# EAGLE board ifacegdcombo (EAGLE 7.2.0)
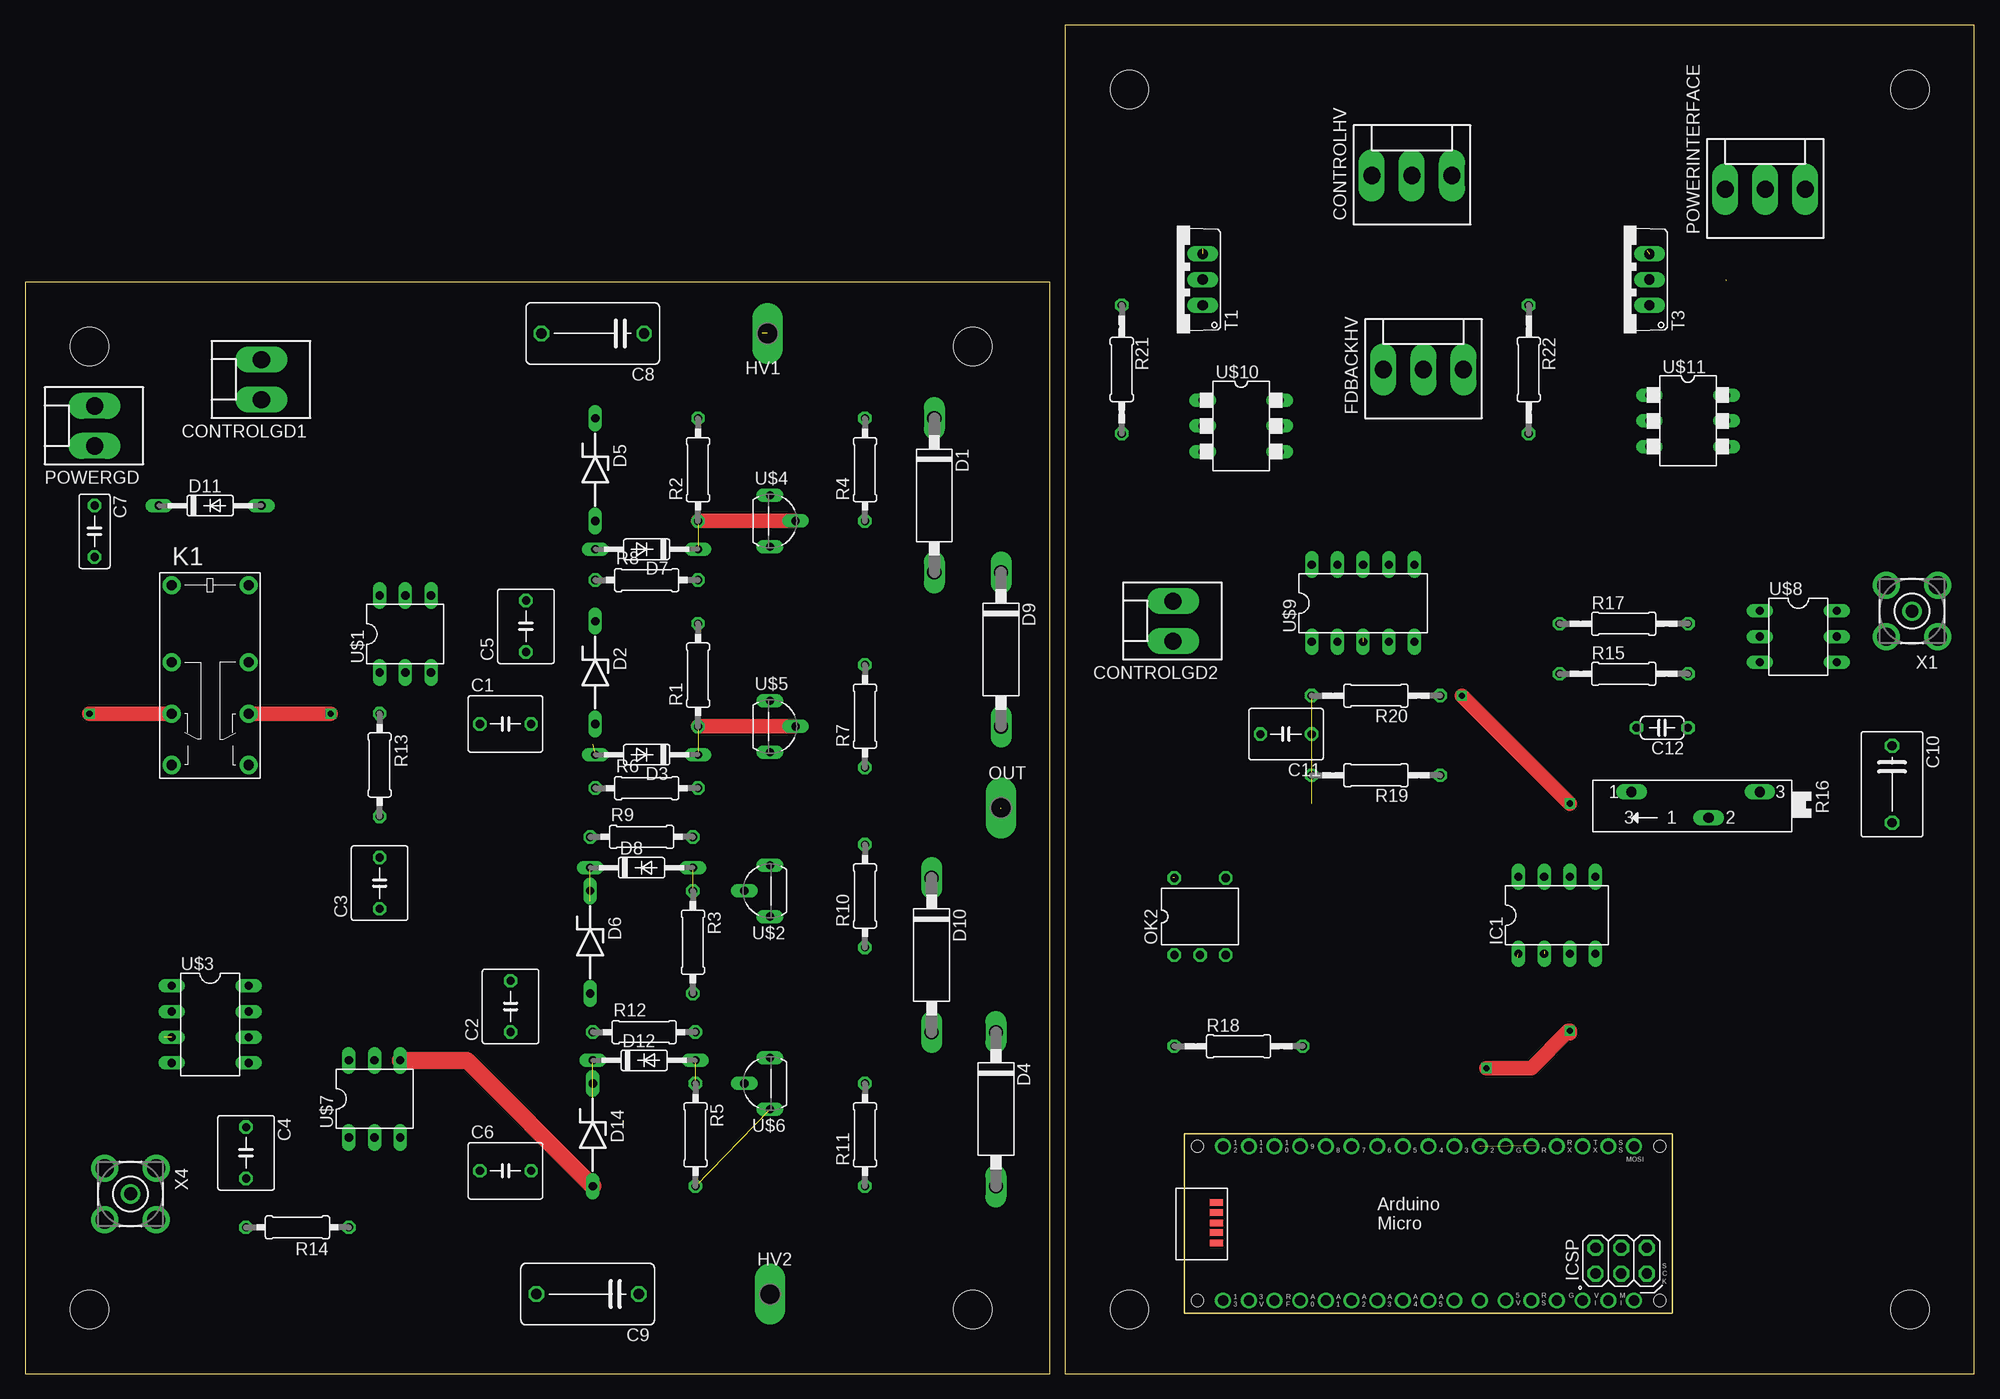
[diagram p0: board, top side]
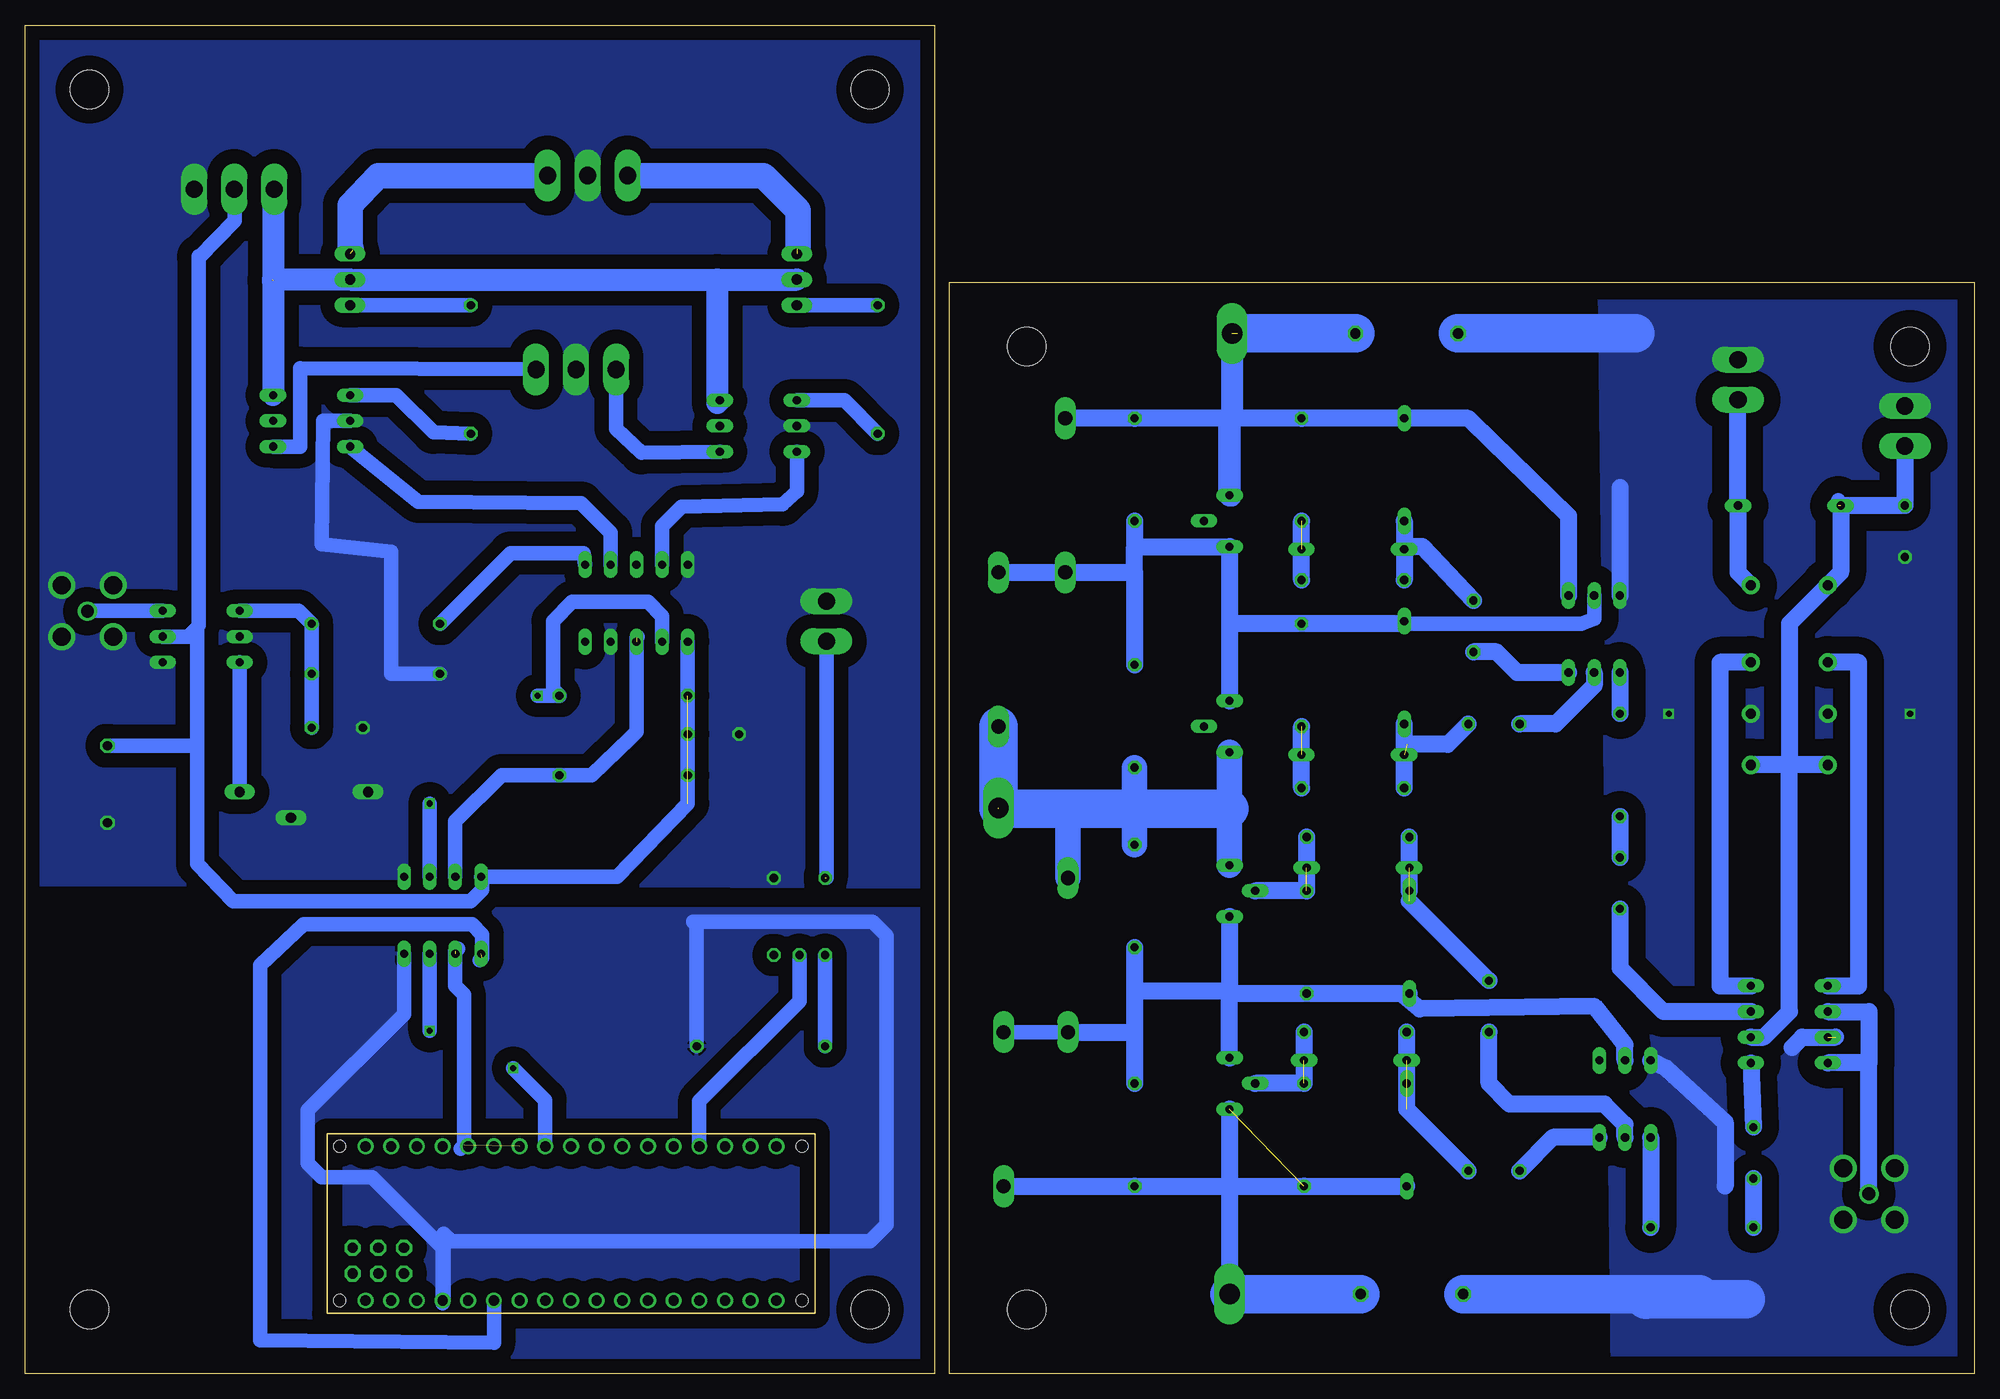
[diagram p1: board, bottom side, seen from below]

Size 192.79 x 133.35 mm. Coordinates in mm from the lower left corner, seen from the top.
Outline: 0,0 101.35,0 101.35,107.95 0,107.95 0,0
Outline: 102.87,0 192.79,0 192.79,133.35 102.87,133.35 102.87,0
Copper layers (1*16): Top 0.035mm / dielectric 1.5mm / Bottom 0.035mm
Design rules "default": minimum track width 10mil, minimum drill 24mil, track to track 8mil, track to pad 8mil, pad to pad 8mil, via to via 8mil, smd to smd 8mil, copper to edge 40mil, drill to drill 8mil, minimum pad ring 10mil, minimum via ring 8mil, stop-mask expansion 4mil, vias tented up to drill 0mil, thermal gap 10mil
Holes 3.8 mm at 93.73,101.6 93.73,6.35 6.35,6.35 6.35,101.6 186.44,6.35 186.44,127 109.22,127 109.22,6.35

## Footprints (pad centres in the part's own frame; a part is rotated, then mirrored left to right if it is on the bottom)
C050-055X075 = drill 0.813 octagon: 1 -2.54,0; 2 2.54,0
C050-030X075 = drill 0.813 octagon: 1 -2.54,0; 2 2.54,0
C102-064X133 = drill 1.016 octagon: 1 -5.08,0; 2 5.08,0
C075-063X106 = drill 0.914 octagon: 1 -3.81,0; 2 3.81,0
C050-050X075 = drill 0.813 octagon: 1 -2.54,0; 2 2.54,0
C050-024X044 = drill 0.813 octagon: 1 -2.54,0; 2 2.54,0
KK-156-2 = drill 1.7 pad 2.184 long: 1 -1.98,0; 2 1.98,0
KK-156-3 = drill 1.7 pad 2.184 long: 1 -3.96,0; 2 0,0; 3 3.96,0
C1702-15 = drill 1.397 long: A 7.62,0; C -7.62,0
ZDIO-10 = drill 0.813 long: A 5.08,0; C -5.08,0
DO35-10 = drill 0.813 long: A 5.08,0; C -5.08,0
P1-20Y = drill 2.007 pad 2.54 long: TP 0,0
DIL08 = drill 0.813 long: 1 -3.81,-3.81; 2 -1.27,-3.81; 3 1.27,-3.81; 4 3.81,-3.81; 5 3.81,3.81; 6 1.27,3.81; 7 -1.27,3.81; 8 -3.81,3.81
G5V-2 = drill 1 pad 1.8: 1 -8.89,-3.81; 4 -1.27,-3.81; 6 3.81,-3.81; 8 8.89,-3.81; 9 8.89,3.81; 11 3.81,3.81; 13 -1.27,3.81; 16 -8.89,3.81
DIL05 = drill 0.813 octagon: 1 -2.54,-3.81; 2 0,-3.81; 3 2.54,-3.81; 4 2.54,3.81; 6 -2.54,3.81
ARDUINO_MICRO = drill 1.016 pad 1.575: 3V3 6.35,1.27; +5V 31.75,1.27; A0 11.43,1.27; A1 13.97,1.27; A2 16.51,1.27; A3 19.05,1.27; A4 21.59,1.27; A5 24.13,1.27; D2 29.21,16.51; D3 26.67,16.51; D4 24.13,16.51; D5 21.59,16.51; D6 19.05,16.51; D7 16.51,16.51; D8 13.97,16.51; D9 11.43,16.51; D10 8.89,16.51; D11 6.35,16.51; D12 3.81,16.51; D13 3.81,1.27; GND 31.75,16.51; GND. 36.83,1.27; MISO] 41.91,1.27; MOSI 44.45,16.51; NC 26.67,1.27; NC. 29.21,1.27; REF 8.89,1.27; RST 34.29,16.51; RST. 34.29,1.27; RX1 36.83,16.51; SCK 44.45,1.27; SS 41.91,16.51; TX1 39.37,16.51; VIN 39.37,1.27 | drill 1.016 pad 1.575 octagon: 5V 40.64,6.477; GND_ 45.72,6.477; MISO. 40.64,3.937; MOSI. 43.18,6.477; RESET.. 45.72,3.937; SCK. 43.18,3.937 | smd 1.27 x 0.635: <USB>+V 3.15,10.947; <USB>D+ 3.15,9.957; <USB>D- 3.15,8.941; <USB>GND 3.15,6.96; <USB>ID 3.15,7.976 | hole 1.2: 1.27,1.27; 1.27,16.51; 46.99,16.51; 46.99,1.27
0207/10 = drill 0.813 octagon: 1 -5.08,0; 2 5.08,0
0207/12 = drill 0.813 octagon: 1 -6.35,0; 2 6.35,0
SP19L = drill 1.016 long: A 5.715,-1.27; E -6.985,-1.27; S -1.905,1.27
TO220V = drill 1.016 long: 1 -2.54,-2.54; 2 0,-2.54; 3 2.54,-2.54
DIL06 = drill 0.813 long: 1 -2.54,-3.81; 2 0,-3.81; 3 2.54,-3.81; 4 2.54,3.81; 5 0,3.81; 6 -2.54,3.81
TO92L = drill 0.813 long: 1 0,-2.54; 2 2.54,0; 3 0,2.54
DIL06' = drill 0.813 long: DIV 2.54,3.81; GND 0,-3.81; MOD -2.54,-3.81; OUT -2.54,3.81; SET 2.54,-3.81; VCC 0,3.81
DIL10 = drill 0.813 long: 1 -5.08,-3.81; 2 -2.54,-3.81; 3 0,-3.81; 4 2.54,-3.81; 5 5.08,-3.81; 6 5.08,3.81; 7 2.54,3.81; 8 0,3.81; 9 -2.54,3.81; 10 -5.08,3.81
DIL06-4 = drill 0.813 long: 1 -2.54,-3.81; 2 0,-3.81; 3 2.54,-3.81; 4 2.54,3.81; 5 0,3.81; 6 -2.54,3.81
BU-SMA-V = drill 1.27: 1 0,0 | drill 1.778: 2 -2.55,2.55; 3 2.55,2.55; 4 2.55,-2.55; 5 -2.55,-2.55

## Placement (x,y rotation side)
C1  .22u  [C050-055X075]  47.5,64.26 0 top
C2  .22u  [C050-055X075]  48.01,36.32 90 top
C3  .22u  [C050-055X075]  35.05,48.51 90 top
C4  .22u  [C050-055X075]  21.84,21.84 270 top
C5  .22u  [C050-055X075]  49.53,73.91 90 top
C6  .22u  [C050-055X075]  47.5,20.07 0 top
C7  [C050-030X075]  6.86,83.31 270 top
C8  10p  [C102-064X133]  56.13,102.87 180 top
C9  10p  [C102-064X133]  55.63,7.87 180 top
C10  [C075-063X106]  184.66,58.29 270 top
C11  [C050-050X075]  124.71,63.25 180 top
C12  10n  [C050-024X044]  161.93,63.88 180 top
CONTROLGD1  [KK-156-2]  23.37,98.3 90 top
CONTROLGD2  [KK-156-2]  113.54,74.42 90 top
CONTROLHV  [KK-156-3]  137.16,118.49 0 top
D1  P6KEXXA  [C1702-15]  89.92,86.87 270 top
D2  4742  [ZDIO-10]  56.39,69.34 270 top
D3  1N4148DO35-10  [DO35-10]  61.47,61.21 180 top
D4  P6KEXXA  [C1702-15]  96.01,26.16 270 top
D5  4742  [ZDIO-10]  56.39,89.41 270 top
D6  4742  [ZDIO-10]  55.88,42.67 270 top
D7  1N4148DO35-10  [DO35-10]  61.47,81.53 180 top
D8  1N4148DO35-10  [DO35-10]  60.96,50.04 0 top
D9  P6KEXXA  [C1702-15]  96.52,71.63 270 top
D10  P6KEXXA  [C1702-15]  89.66,41.4 270 top
D11  1N4148DO35-10  [DO35-10]  18.29,85.85 0 top
D12  1N4148DO35-10  [DO35-10]  61.21,30.99 0 top
D14  4742  [ZDIO-10]  56.13,23.62 270 top
FDBACKHV  [KK-156-3]  138.3,99.31 0 top
HV1  TPPAD1-20Y  [P1-20Y]  73.41,102.87 180 top
HV2  TPPAD1-20Y  [P1-20Y]  73.66,7.87 0 top
IC1  ISO1540  [DIL08]  151.51,45.34 0 top
K1  G5V-2  [G5V-2]  18.29,69.09 270 top
OK2  H11F1  [DIL05]  116.2,45.21 0 top
OUT  TPPAD1-20Y  [P1-20Y]  96.52,55.96 0 top
PCB1  ARDUINO_MICRO  [ARDUINO_MICRO]  114.68,5.97 0 top
POWERGD  [KK-156-2]  6.86,93.73 90 top
POWERINTERFACE  [KK-156-3]  172.11,117.14 0 top
R1  50k  [0207/10]  66.55,69.09 90 top
R2  50k  [0207/10]  66.55,89.41 90 top
R3  50k  [0207/10]  66.04,42.67 270 top
R4  1M  [0207/10]  83.06,89.41 90 top
R5  50k  [0207/10]  66.29,23.62 270 top
R6  70  [0207/10]  61.47,57.91 0 top
R7  1M  [0207/10]  83.06,65.02 90 top
R8  70  [0207/10]  61.47,78.49 0 top
R9  70  [0207/10]  60.96,53.09 0 top
R10  1M  [0207/10]  83.06,47.24 90 top
R11  1M  [0207/10]  83.06,23.62 90 top
R12  70  [0207/10]  61.21,33.78 0 top
R13  70  [0207/10]  35.05,60.2 270 top
R14  1M  [0207/10]  26.92,14.48 180 top
R15  10k  [0207/12]  158.12,69.22 0 top
R16  [SP19L]  164.59,56.26 180 top
R17  40k  [0207/12]  158.12,74.17 0 top
R18  100  [0207/12]  120.02,32.38 0 top
R19  1.5k  [0207/12]  133.6,59.18 180 top
R20  1.5k  [0207/12]  133.6,67.06 180 top
R21  1k  [0207/12]  108.46,99.31 270 top
R22  1k  [0207/12]  148.72,99.31 270 top
T1  TIP122V  [TO220V]  113.92,108.2 90 top
T3  TIP122V  [TO220V]  158.12,108.2 90 top
U$1  DA-2320  [DIL06]  37.59,73.15 0 top
U$2  VN0550L  [TO92L]  73.66,47.75 180 top
U$3  UCC27425  [DIL08]  18.29,34.54 270 top
U$4  VP0550L  [TO92L]  73.66,84.33 0 top
U$5  VP0550L  [TO92L]  73.66,64.01 0 top
U$6  VN0550L  [TO92L]  73.66,28.7 180 top
U$7  DA-2320  [DIL06]  34.54,27.18 0 top
U$8  LTC6992  [DIL06']  175.39,72.9 270 top
U$9  MCP4728DIL  [DIL10]  132.33,76.2 0 top
U$10  MAX9650DIL  [DIL06-4]  120.27,93.73 270 top
U$11  MAX9650DIL  [DIL06-4]  164.47,94.23 270 top
X1  BU-SMA-V  [BU-SMA-V]  186.64,75.41 180 top
X4  BU-SMA-V  [BU-SMA-V]  10.41,17.78 270 top

## Library data of the parts
C1-C6 C8-C10 C12 R15 R17 R19-R22 = resistor
C7 C11 R1-R14 R18 = rcl
CONTROLGD1 CONTROLGD2 CONTROLHV FDBACKHV POWERGD POWERINTERFACE = con-molex; OC_FARNELL: unknown; OC_NEWARK: unknown
D1-D12 D14 = diode
HV1 HV2 OUT = testpad
IC1 U$3 = texas
K1 = relay; MPN: G5V-2 5DC; OC_FARNELL: 9949488; OC_NEWARK: 78K5703
OK2 = optocoupler; OC_FARNELL: unknown; OC_NEWARK: unknown
PCB1 = E14_Arduino_published
R16 = pot
T1 T3 = transistor-npn
U$1 U$7 = trafo
U$2 U$4-U$6 = transistor-fet
U$8 = linear-technology
U$9 = microchip
U$10 U$11 = maxim
X1 X4 = con-coax; OC_FARNELL: unknown; OC_NEWARK: unknown

## Nets
+12V: POWERINTERFACE.1 T1.2 T3.2 U$10.6 U$11.6
+15V: C7.1 D11.C K1.1 K1.8 K1.9 POWERGD.1 U$3.6
A+5: IC1.1 PCB1.+5V
AGND: IC1.4 PCB1.GND. R18.2
D4: PCB1.D4
D7: PCB1.D7
D8: PCB1.D8
D10: PCB1.D10
D11: PCB1.D11
ENSW: CONTROLGD1.1 D11.A K1.16
ENSW2: CONTROLGD2.1 OK2.6
GND: C7.2 C8.2 C9.2 CONTROLGD1.2 K1.6 K1.11 POWERGD.2 U$1.6 U$3.3 U$7.6 X4.2 X4.3 X4.4 X4.5
GND1: C10.2 C11.2 C12.2 CONTROLGD2.2 CONTROLHV.2 FDBACKHV.2 IC1.5 OK2.4 POWERINTERFACE.3 R15.1 R16.A R16.S U$8.DIV U$8.GND U$9.4 U$9.10 U$10.2 U$11.2 X1.2 X1.3 X1.4 X1.5
N$1: U$3.2 U$3.4 X4.1
N$2: C3.1 U$3.7
N$3: R13.1 U$1.1
N$4: C4.1 U$3.5
N$5: C1.1 U$1.2
N$6: R14.1 U$7.1
N$7: C5.1 U$1.3
N$8: D3.C R1.1 R6.2 U$5.2
N$9: U$7.5
N$10: C1.2 D2.A D3.A R6.1
N$11: D12.A R5.1 R12.2 U$6.2
N$12: D7.C R2.1 R8.2 U$4.2
N$13: D4.C D6.A D10.A R3.2 R10.1 R11.2 U$2.3 U$6.1
N$14: K1.4 U$3.1
N$15: K1.13 U$3.8
N$16: C5.2 D5.A D7.A R8.1
N$17: C8.1 D1.C D5.C HV1.TP R2.2 R4.2 U$1.4 U$4.3
N$18: D1.A D2.C D9.C R1.2 R4.1 R7.2 U$1.5 U$4.1 U$5.3
N$19: C3.2 R13.2
N$20: C4.2 R14.2
N$21: D9.A D10.C OUT.TP R7.1 R10.2 U$2.1 U$5.1
N$22: C2.1 U$7.2
N$23: C6.1 U$7.3
N$24: C9.1 D4.A D14.A HV2.TP R5.2 R11.1 U$6.3 U$7.4
N$25: C2.2 D6.C D8.C R9.1
N$26: R16.E U$8.SET
N$27: C6.2 D12.C D14.C R12.1
N$28: U$8.OUT X1.1
N$29: OK2.1 R18.1
N$30: C12.1 R15.2 R17.2 U$8.MOD
N$31: FDBACKHV.1 U$10.4
N$32: FDBACKHV.3 U$11.4
N$33: U$9.9 U$10.3
N$34: U$9.8
N$35: U$9.7 U$11.3
N$36: R17.1 U$9.6
N$37: R22.1 T3.1
N$38: R21.2 U$10.1
N$39: R22.2 U$11.1
N$41: CONTROLHV.1 T1.3
N$42: CONTROLHV.3 T3.3
N$43: R21.1 T1.1
N$251: D8.A R3.1 R9.2 U$2.2
PWM5: PCB1.D5
PWM6: PCB1.D6
PWM9: OK2.2 PCB1.D9
SCL: IC1.3 PCB1.D3
SCL_OUT: IC1.6 R20.1 U$9.2
SDA: IC1.2 PCB1.D2
SDA_OUT: IC1.7 R19.1 U$9.3
VCC: C10.1 C11.1 IC1.8 POWERINTERFACE.2 R19.2 R20.2 U$8.VCC U$9.1

## Tracks (layer width: path | path; a pad name or v marks a point on that pad's centre or on a via)
+12V  (1 unrouted)
  Bottom 2.184: U$10.6 124.33,96.01 124.33,108.2 | 124.33,108.2 T3.2 168.28,108.2 | 124.33,108.2 T1.2 | POWERINTERFACE.1 168.28,117.02 168.28,108.08 U$11.6
+15V  (1 unrouted)
  Bottom 1.422: 13.46,85.85 13.46,86.36
  Bottom 1.676: D11.C 13.21,79.25 K1.1 18.29,74.17 18.29,60.2 | 18.29,60.2 18.29,35.81 20.83,33.27 U$3.6 | 18.29,60.2 K1.9 | K1.8 18.29,60.2 | POWERGD.1 C7.1 13.46,85.85
A+5  (1 unrouted)
  Bottom 1.422: PCB1.+5V 146.43,3.05 169.54,3.3 169.54,40.39 165.23,44.45 148.59,44.45 147.57,43.43 147.57,41.15 147.83,40.89
AGND
  Bottom 1.422: IC1.4 155.32,35.56 164.85,26.04 164.85,20.83 163.45,19.43 158.5,19.43 151.51,12.45 PCB1.GND. | PCB1.GND. 151.51,6.99 | R18.2 126.36,44.32 126.75,44.7 108.97,44.7 107.57,43.31 107.57,14.73 109.22,13.08 150.62,13.08 151.38,13.84 151.38,7.37 PCB1.GND.
  pour Bottom (isolate 1.422): 102.74,0.13 192.02,0.13 192.15,46.1 103,45.97
ENSW
  Bottom 1.676: CONTROLGD1.1 D11.A 23.37,79.25 K1.16
ENSW2  (1 unrouted)
  Bottom 1.422: CONTROLGD2.1 113.54,49.02
GND  (via drill 0.6)  (1 unrouted)
  Top 1.422: K1.11 v30.23,65.28 | K1.6 v6.35,65.28
  Bottom 1.676: 35.05,87.63 U$1.6 | U$7.6 30.48,30.23 24.64,24.89 24.64,18.54 | 18.03,32.26 17.02,33.27 13.72,33.27
  Bottom 3.81: 32.46,7.32 27.18,7.34 | 27.18,7.34 22.61,7.37 | C8.2 33.53,102.87 | C9.2 27.18,7.87 27.18,7.34
  pour Bottom (isolate 1.676, no thermals): 0.25,107.7 37.08,107.7 35.81,0 0.25,0
GND1
  Bottom 1.422: U$11.2 163.32,94.23 163.45,82.04 156.59,81.28 156.59,69.22 R15.1
  pour Bottom (isolate 1.422, no thermals): 103,133.22 192.91,133.22 192.79,48.39 172.21,48.39 172.47,48.51 103.25,48.13
N$1
  Bottom 1.676: X4.1 10.41,30.73 | U$3.2 10.41,35.81 10.41,30.73 | 10.41,30.73 U$3.4
N$2
  Bottom 1.676: U$3.7 30.73,35.81 35.05,40.13 C3.1
N$3
  Bottom 1.676: U$1.1 R13.1
N$4
  Bottom 1.676: U$3.5 C4.1
N$5
  Bottom 1.676: U$1.2 37.59,68.07 41.4,64.26 C1.1
N$6
  Bottom 1.676: U$7.1 R14.1
N$7
  Bottom 1.676: U$1.3 45.21,69.34 47.24,71.37 C5.1
N$8  (1 unrouted)
  Top 1.422: U$5.2 R1.1
  Bottom 1.676: R6.2 R1.1
N$9
  Bottom 1.676: U$7.5 34.54,32.51 37.59,36.32 54.86,36.07 56.64,37.59 59.44,37.59
N$10  (1 unrouted)
  Bottom 1.676: C1.2 52.07,62.23 56.13,62.23 56.39,62.48 | 56.39,62.48 D2.A | R6.1 56.39,62.48
N$11  (1 unrouted)
  Bottom 1.676: R12.2 R5.1 U$6.2
N$12  (1 unrouted)
  Top 1.422: U$4.2 R2.1
  Bottom 1.676: R8.2 R2.1
N$13
  Bottom 1.422: D4.C D10.A
  Bottom 1.676: U$2.3 73.66,37.59 | R10.1 83.06,37.59 | 83.06,37.59 83.06,33.78 | 83.06,33.78 R11.2 | D10.A 83.06,33.78 | D6.A R3.2 73.66,37.59 | U$6.1 73.66,37.59 | 73.66,37.59 73.41,37.85 82.8,37.85 83.06,37.59
N$14
  Bottom 1.676: 13.97,38.35 U$3.1 11.43,38.35 11.43,70.36 K1.4
N$15
  Bottom 1.676: K1.13 25.15,70.36 25.15,38.35 U$3.8
N$16
  Bottom 1.676: C5.2 54.61,81.79 56.13,81.79 D7.A | D7.A R8.1 | D5.A D7.A
N$17  (1 unrouted)
  Bottom 1.676: 73.41,94.49 73.41,86.61 U$4.3 | 73.41,94.49 73.68,94.48 73.42,94.23 73.41,94.49 | 73.41,94.49 R4.2 D1.C | U$1.4 40.13,84.84 49.78,94.23 50.04,94.49 D5.C R2.2 73.41,94.49
  Bottom 2.184: U$4.3 73.68,94.48 | HV1.TP 73.41,94.49
  Bottom 3.81: C8.1 72.9,102.87
N$18
  Bottom 1.422: U$1.5 37.59,74.68 38.86,74.17 R1.2
  Bottom 1.676: 73.66,74.17 U$4.1 83.06,81.79 | 73.66,74.17 U$5.3 | D9.C D1.A 83.06,79.25 | 83.06,79.25 83.06,81.79 | 83.06,79.25 R7.2 | R4.1 83.06,81.79 | D2.C 56.64,74.17 R1.2 73.66,74.17
N$19
  Bottom 1.676: R13.2 C3.2
N$20
  Bottom 1.676: C4.2 R14.2
N$21  (1 unrouted)
  Bottom 2.54: U$5.1 73.66,55.88 U$2.1 | R10.2 83.06,55.88 R7.1 | D10.C 89.66,55.88
  Bottom 3.81: D9.A 96.52,55.88 89.66,55.88 83.06,55.88 73.66,55.88
N$22
  Bottom 1.676: U$7.2 34.54,24.64 36.58,26.67 45.97,26.67 48.01,28.7 C2.1
N$23
  Bottom 1.676: U$7.3 41.66,23.37 C6.1
N$24  (1 unrouted)
  Top 1.676: U$7.4 43.69,30.99 D14.A
  Bottom 1.676: D4.A R11.1 R5.2 D14.A | 73.66,7.62 HV2.TP U$6.3
  Bottom 3.81: HV2.TP C9.1
N$25  (2 unrouted)
  Bottom 1.676: C2.2 55.88,46.74 | D6.C R9.1
N$26
  Bottom 1.422: U$8.SET R16.E
N$27  (2 unrouted)
  Bottom 1.676: C6.2 56.13,26.16 R12.1
N$28
  Bottom 1.422: U$8.OUT 186.36,75.44 X1.1
N$29
  Bottom 1.422: OK2.1 R18.1
N$30
  Bottom 1.422: U$8.MOD 165.74,75.44 R17.2 R15.2 C12.1
N$31
  Bottom 1.422: U$10.4 131.83,91.06 134.37,93.47 134.37,98.96 FDBACKHV.1
N$32
  Bottom 1.422: U$11.4 165.61,91.69 165.61,99.44 FDBACKHV.3
N$33
  Bottom 1.422: U$10.3 116.46,87.25 117.86,85.98 127.89,85.72 129.79,83.82 U$9.9
N$35
  Bottom 1.422: U$9.7 134.87,83.19 137.79,86.11 153.92,86.23 U$11.3
N$36
  Bottom 1.422: U$9.6 137.54,81.15 144.78,81.15 R17.1
N$37
  Bottom 1.422: T3.1 R22.1
N$38
  Bottom 1.422: U$10.1 111.76,96.27 R21.2
N$39
  Bottom 1.422: U$11.1 156.08,96.77 152.4,93.09 R22.2
N$41  (1 unrouted)
  Bottom 2.184: 116.33,111.38 116.46,111.25
  Bottom 2.54: CONTROLHV.1 119.76,118.49 116.33,115.06 116.33,111.38
N$42  (1 unrouted)
  Bottom 2.184: 160.53,111.25 160.4,111.12
  Bottom 2.54: CONTROLHV.3 157.86,118.49 160.66,115.57 160.66,111.38 160.53,111.25
N$43
  Bottom 1.422: R21.1 T1.1
N$251  (1 unrouted)
  Bottom 1.676: R9.2 R3.1 U$2.2
PWM9
  Bottom 1.422: OK2.2 116.2,36.83 126.11,26.92 PCB1.D9
SCL  (via drill 0.6)
  Top 1.422: v144.53,30.23 148.97,30.23 152.65,33.91 152.78,33.66 v152.78,33.91
  Bottom 1.422: PCB1.D3 141.35,27.05 v144.53,30.23 | v152.78,33.91 IC1.3
SCL_OUT  (via drill 0.6)
  Top 1.422: v142.11,67.06 v152.78,56.39
  Bottom 1.422: U$9.2 129.79,74.93 131.19,76.33 138.68,76.33 140.59,74.42 140.59,67.69 R20.1 v142.11,67.06 | v152.78,56.39 IC1.6
SDA  (2 unrouted)
  Bottom 1.422: 149.73,22.23 149.35,22.61 149.35,37.47 150.24,38.35 150.24,41.78 149.99,42.04
SDA_OUT  (1 unrouted)
  Bottom 1.422: IC1.7 150.24,54.61 145.67,59.18 R19.1 136.78,59.18 132.97,62.87 132.33,63.5 132.33,72.77 132.21,72.9
VCC  (3 unrouted)
  Bottom 1.422: 175.77,73.79 175.64,74.04 175.64,110.36 | 175.77,73.79 176.66,72.9 U$8.VCC | C10.1 175.77,62.1 | 175.77,62.1 175.77,73.79 | U$9.1 127.25,56.39 134.24,49.15 IC1.8 147.57,49.02 147.57,47.88 148.72,46.74 172.21,46.74 175.77,50.42 175.77,62.1 | POWERINTERFACE.2 172.09,114 175.64,110.36 | 175.64,110.49 175.64,110.36